# Altium PCB Guitar 元器件.pcbdoc
Units mil, origin at the board's own origin, x right, y up, seen from the top; angles counter-clockwise.
Board outline 4350 x 7276.94 mil, 2 copper layers (Top Layer, Bottom Layer); 41 components, 77 nets, 187 pads, 0 vias.
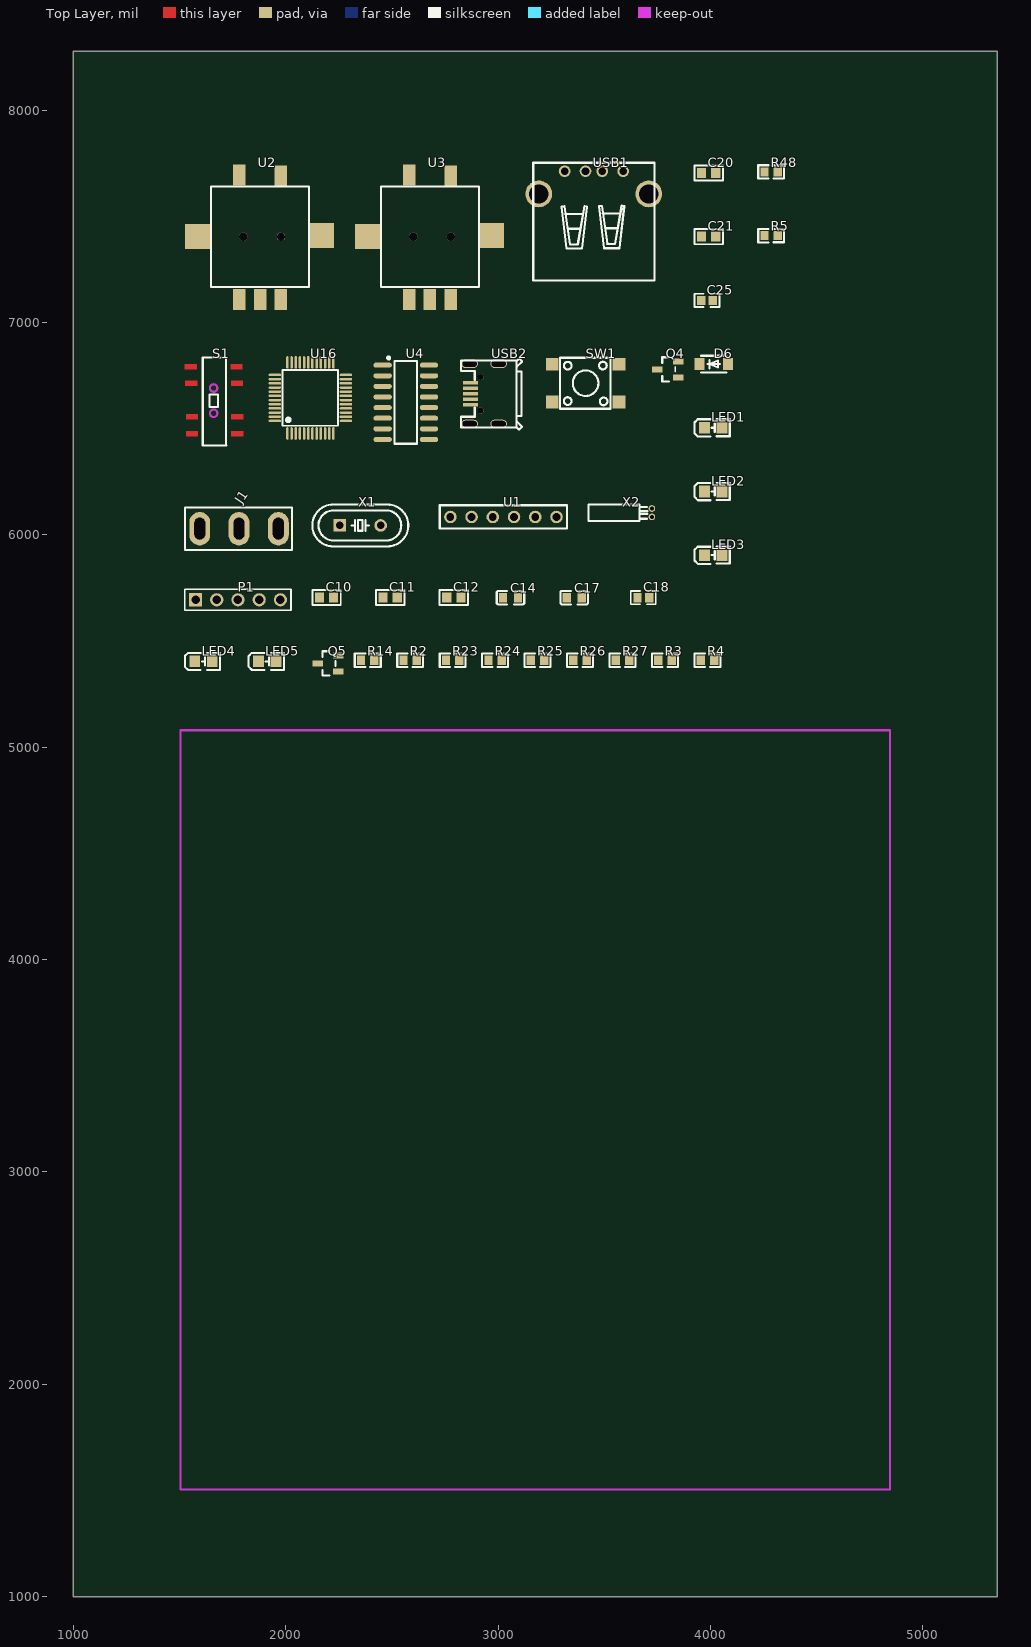
[diagram p0: Top Layer view]
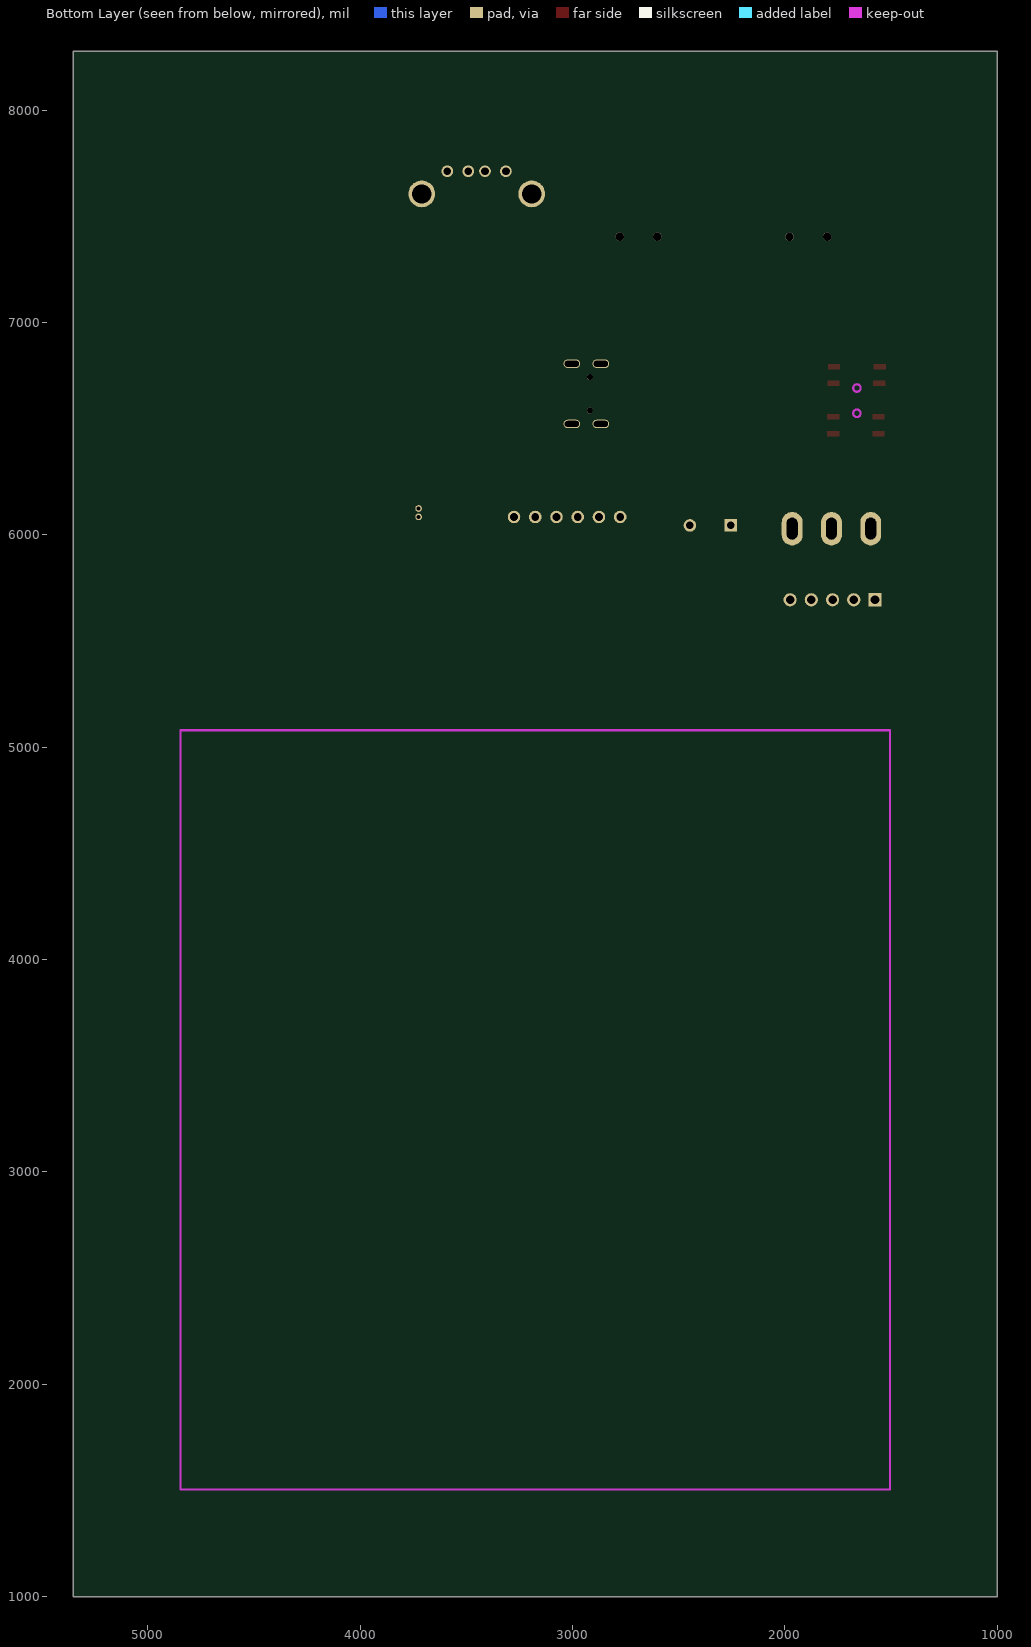
[diagram p1: Bottom Layer view, seen from below]

## Layer stack, top to bottom
Top Layer: signal copper (thickness not stored)
Dielectric: dielectric 12.6, FR-4, Dk 4.8
Bottom Layer: signal copper (thickness not stored)

## Board outline
5350,1000 1000,1000 1000,8276.94 5350,8276.94

## Components (designator, comment, footprint, x,y, rotation, side; value= is the part's Value field where it differs from the comment)
C10 "100nF" C0603#1 2158.46,5704.44 r0 top
C11 "100nF" C0603#1 2458.46,5704.44 r0 top
C12 "100nF" C0603#1 2758.46,5704.44 r0 top
C14 "10pF" C0603#2 3058.46,5704.44 r0 top
C17 "10pF" C0603#2 3358.46,5704.44 r0 top
C18 "22pF" 0603 3684.06,5704.44 r0 top
C20 "100nF" C0603#1 3958.46,7704.44 r0 top
C21 "10nF" C0603#1 3958.46,7404.44 r0 top
C25 "22pF" 0603 3984.06,7104.44 r0 top
D6 "1N4148W T4" SOD-123_L2.8-W1.8-LS3.7-RD 4015.55,6804.44 r0 top
J1 "MTS-102/3" MTS-102/MTS-103/MTS-123 1780,6029.44 r0 top
LED1 "17-21/GHC-XS1T2M/3T" LED0805-R-RD 4012.55,6504.49 r0 top
LED2 "17-21/GHC-XS1T2M/3T" LED0805-R-RD 4012.55,6204.49 r0 top
LED3 "17-21/GHC-XS1T2M/3T" LED0805-R-RD 4012.55,5904.49 r0 top
LED4 "17-21/GHC-XS1T2M/3T" LED0805-R-RD 1612.55,5404.49 r0 top
LED5 "17-21/GHC-XS1T2M/3T" LED0805-R-RD 1912.55,5404.49 r0 top
P1 "2.54mm 1*5P Header" HDR-TH_5P-P2.54-V 1775,5694.44 r0 top
Q4 "S8050" SOT-23-3_L2.9-W1.6-P1.90-LS2.8-BR 3798.81,6779.44 r0 top
Q5 "S8550" SOT-23-3_L2.9-W1.3-P1.90-LS2.4-BR 2198.81,5394.44 r0 top
R2 "1K" R0603 2586.02,5409.44 r0 top
R3 "1K" R0603 3786.02,5409.44 r0 top
R4 "1K" R0603 3986.02,5409.44 r0 top
R5 "1K" R0603 4286.02,7409.44 r0 top
R14 "1K" R0603 2386.02,5409.44 r0 top
R23 "10K" R0603 2786.02,5409.44 r0 top
R24 "1K" R0603 2986.02,5409.44 r0 top
R25 "1K" R0603 3186.02,5409.44 r0 top
R26 "1K" R0603 3386.02,5409.44 r0 top
R27 "10K" R0603 3586.02,5409.44 r0 top
R48 "1M" R0603 4286.02,7709.44 r0 top
S1 "八脚拨动开关" MSS23D19 1554.96,6614.44 r0 top
SW1 "PTS645SH43SMTR92LFS" KEY-SMD_4P-L6.0-W6.0-P4.50-LS9.0 3412.01,6714.44 r0 top
U1 "Header1*6" HEADER6 3025,6084.44 r0 top
U2 "EC11SMT" EC11SMT 1879.06,7404.44 r0 top
U3 "EC11SMT" EC11SMT 2679.05,7404.44 r0 top
U4 "CH340C" SOP-16_150MIL 2565.5,6624.44 r0 top
U16 "STM32F103C8T6" LQFP-48_L7.0-W7.0-P0.50-LS9.0-BL 2115.94,6644.94 r0 top
USB1 "KH-AF90DIP-112" USB-A-TH_USB-A-F-90 3450.69,7659.44 r0 top
USB2 "U-F-M5DD-Y-1" MICRO-USB-SMD_U-F-M5DD-Y-1 2934.24,6664.44 r0 top
X1 "8MHz" HC-49US_L11.5-W4.5-P4.88 2351.06,6044.44 r0 top
X2 "32.768KHz" OSC-TH_BD2.0-P0.70-D0.3 3724.21,6104.44 r0 top

## Footprints (in the part's own frame and the unit in brackets; to place one, negate y for a bottom-side part, rotate by r counter-clockwise, add the part's x,y. Pads: shape width x height; smd on the part's side, far side on the other; paste and mask are expansions set on the pad)
0603 [mm]
  rect 1x1.1 smd: 1(-0.7,0) 2(0.7,0)
  silkscreen extent -1.5,-0.8 1.5,0.8
C0603#1 [mil]
  rect 43.3x47.2 smd: 1(0,0) 2(66.9,0)
  silkscreen extent -33,-35 100,35
C0603#2 [mil]
  rect 39.37x43.31 smd: 1(-35.43,0) 2(35.43,0)
  silkscreen extent -65,-31 65,31
EC11SMT [mm]
  rect 3x3 smd: 0(-7.493,0) 0(7.366,0.127)
  rect 1.5x2.5 smd: 1(-2.5,7.366) 2(2.5,7.239) 3(-2.5,-7.493) 4(0,-7.493) 5(2.5,-7.493)
  round 1 hole 1 unplated: ""(-2,0) ""(2.5,0)
  silkscreen extent -5.85,-6 5.85,6
HC-49US_L11.5-W4.5-P4.88 [mm]
  rect 1.5x1.5 hole 0.9: 1(-2.438,0)
  round 1.5 hole 0.9: 2(2.438,0)
  silkscreen extent -5.74,-2.5 5.74,2.5
HDR-TH_5P-P2.54-V [mil]
  rect 62x62 hole 40.16: 1(-200,0)
  round 62 hole 40.16: 2(-100,0) 3(0,0) 4(100,0) 5(200,0)
  silkscreen extent -250,-50 250,50
HEADER6 [mm]
  round 1.5 hole 0.914: 1(-6.35,0) 2(-3.81,0) 3(-1.27,0) 4(1.27,0) 5(3.81,0) 6(6.35,0)
  silkscreen extent -7.62,-1.4 7.62,1.4
KEY-SMD_4P-L6.0-W6.0-P4.50-LS9.0 [mm]
  rect 1.5x1.5 smd: 1(-4,2.25) 2(4,2.25) 3(-4,-2.25) 4(4,-2.25)
  silkscreen extent -3.05,-3.05 2.98,3.05
LED0805-R-RD [mil]
  rect 51.2x55.1 smd: 1(41.35,0) 2(-41.35,0)
  silkscreen extent -88,-41 78,40
LQFP-48_L7.0-W7.0-P0.50-LS9.0-BL [mm]
  oval 0.3x1.5 smd: 1(-2.75,-4.25) 2(-2.25,-4.25) 3(-1.75,-4.25) 4(-1.25,-4.25) 5(-0.75,-4.25) 6(-0.25,-4.25) 7(0.25,-4.25) 8(0.75,-4.25) 9(1.25,-4.25) 10(1.75,-4.25) 11(2.25,-4.25) 12(2.75,-4.25) 25(2.75,4.25) 26(2.25,4.25) 27(1.75,4.25) 28(1.25,4.25) 29(0.75,4.25) 30(0.25,4.25) 31(-0.25,4.25) 32(-0.75,4.25) 33(-1.25,4.25) 34(-1.75,4.25) 35(-2.25,4.25) 36(-2.75,4.25)
  oval 1.5x0.3 smd: 13(4.25,-2.75) 14(4.25,-2.25) 15(4.25,-1.75) 16(4.25,-1.25) 17(4.25,-0.75) 18(4.25,-0.25) 19(4.25,0.25) 20(4.25,0.75) 21(4.25,1.25) 22(4.25,1.75) 23(4.25,2.25) 24(4.25,2.75) 37(-4.25,2.75) 38(-4.25,2.25) 39(-4.25,1.75) 40(-4.25,1.25) 41(-4.25,0.75) 42(-4.25,0.25) 43(-4.25,-0.25) 44(-4.25,-0.75) 45(-4.25,-1.25) 46(-4.25,-1.75) 47(-4.25,-2.25) 48(-4.25,-2.75)
  silkscreen extent -3.33,-3.31 3.3,3.34
MICRO-USB-SMD_U-F-M5DD-Y-1 [mm]
  rect 1.8x0.43 smd: 1(-1.626,-1.3) 2(-1.626,-0.65) 3(-1.626,0) 4(-1.626,0.65) 5(-1.626,1.3)
  oval 1.999x1 hole 0.7 slot 1.7 at 0 deg: 6(-1.735,3.599) 8(-1.735,-3.599)
  oval 1.999x1 hole 0.7 slot 1.7 at 0 deg copper offset 0.001,0: 7(1.735,3.6)
  oval 1.999x1 hole 0.7 slot 1.7 at 0 deg copper offset -0.001,0: 9(1.735,-3.6)
  round 0.7 hole 0.7 unplated: ""(-0.415,-2) ""(-0.415,2)
  silkscreen extent -2.77,-4.28 4.55,4.22
MSS23D19 [mm]
  round 0 smd: 1(-0.061,4.5) 2(0,2.54) 3(0.1,-1.5) 4(0.1,-3.5) 5(5.5,-3.5) 6(5.5,-1.5) 7(5.461,2.54) 8(5.4,4.5)
  Top Layer region: -0.6,-1.8 -0.6,-1.2 0.8,-1.2 0.8,-1.8
  Top Layer region: -0.7,2.24 -0.7,2.84 0.7,2.84 0.7,2.24
  Top Layer region: -0.761,4.2 -0.761,4.8 0.639,4.8 0.639,4.2
  Top Layer region: 4.8,-1.8 4.8,-1.2 6.2,-1.2 6.2,-1.8
  Top Layer region: 4.761,2.24 4.761,2.84 6.161,2.84 6.161,2.24
  Top Layer region: 4.7,4.2 4.7,4.8 6.1,4.8 6.1,4.2
  Top Layer region: 4.8,-3.8 4.8,-3.2 6.2,-3.2 6.2,-3.8
  Top Layer region: -0.6,-3.8 -0.6,-3.2 0.8,-3.2 0.8,-3.8
  Keep-Out Layer lines w0.254: 3.122,-1.062 cw(c2.672,-1.06) 3.122,-1.057 ; 3.122,1.961 cw(c2.672,1.963) 3.122,1.965
  silkscreen extent 1.37,-4.93 4.2,5.61
MTS-102/MTS-103/MTS-123 [mm]
  oval 2.5x4 hole 1.3 slot 2.6 at 90 deg: 1(-4.7,0) 2(0,0) 3(4.7,0)
  silkscreen extent -6.48,-2.54 6.35,2.54
OSC-TH_BD2.0-P0.70-D0.3 [mm]
  round 0.8 hole 0.5: 1(0,0.5) 2(0,-0.5)
  silkscreen extent -7.6,-1 -0.54,1
R0603 [mm]
  rect 1x1.1 smd: 1(-0.8,0) 2(0.8,0)
  silkscreen extent -1.55,-0.8 1.55,0.81
SOD-123_L2.8-W1.8-LS3.7-RD [mm]
  rect 1.2x1.4 smd: 1(-1.7,0) 2(1.7,0)
  silkscreen extent -1.5,-1 1.5,1
SOP-16_150MIL [mil]
  oval 86.53x23.62 smd: 1(-109,175) 2(-109,125) 3(-109,75) 4(-109,25) 5(-109,-25) 6(-109,-75) 7(-109,-125) 8(-109,-175) 9(109,-175) 10(109,-125) 11(109,-75) 12(109,-25) 13(109,25) 14(109,75) 15(109,125) 16(109,175)
  silkscreen extent -87,-195 53,215
SOT-23-3_L2.9-W1.3-P1.90-LS2.4-BR [mm]
  rect 1.25x0.7 smd: 1(1.25,-0.95) 2(1.25,0.95) 3(-1.25,0)
  silkscreen extent -0.65,-1.46 0.9,1.46
SOT-23-3_L2.9-W1.6-P1.90-LS2.8-BR [mm]
  rect 1.25x0.7 smd: 1(1.25,-0.95) 2(1.25,0.95) 3(-1.25,0)
  silkscreen extent -0.65,-1.46 0.9,1.46
USB-A-TH_USB-A-F-90 [mm]
  round 3.2 hole 2.3: 0(-6.571,-1.359) 0(6.571,-1.359)
  round 1.4 hole 0.92: 1(-3.492,1.359) 2(-0.993,1.359) 3(1.008,1.359) 4(3.508,1.359)
  silkscreen extent -7.25,-11.7 7.26,2.37

## Nets (pads, with @x,y where several pads share a name; then routed paths per layer and width w, separated by ;. In a path a pad name is that pad's centre, name@x,y a point inside that pad or via, vN(x,y) a via of type N, cw(c..) or ccw(c..) an arc to the next point about the centre after c; other vN are vias at no path point)
3.3V: C10.2 C11.2 C12.2 P1.4 Q5.2 R2.2 R3.2 R4.2 R5.2 R14.2 R23.2 R27.1 U16.9 U16.24 U16.36 U16.48
5V: C20.1 P1.5 U4.16 USB1.1 USB2.1
BOOT0: J1.3 R26.1 U16.44
BOOT1: J1.1 U16.20
C21_1: C21.1 U4.4
D+: U4.5 USB1.3 USB2.3
D-: U4.6 USB1.2 USB2.2
EX_IN: C17.2 U16.3 X2.2
EX_OUT: C14.2 U16.4 X2.1
GND: C10.1 C11.1 C12.1 C14.1 C17.1 C18.1 C20.2 C21.2 C25.1 J1.2 LED5.2 P1.1 S1.3 S1.6 SW1.3 U1.1 U1.6 U4.1 U16.8 U16.23 U16.35 U16.47 USB1.0 USB1.4 USB2.5 USB2.6 USB2.7 USB2.8 USB2.9
K1: LED4.2 S1.1 U2.1
K2: LED2.2 S1.4 U3.1
LED1_1: LED1.1 R2.1
LED2_1: LED2.1 R3.1
LED3_1: LED3.1 R4.1
LED4_1: LED4.1 R14.1
LED5_1: LED5.1 R5.1
OSC_IN: C18.2 R48.1 U16.5 X1.1
OSC_OUT: C25.2 R48.2 U16.6 X1.2
PA0: U16.10
PA1: U16.11
PA2: U16.12
PA3: U16.13
PA4: U16.14
PA5: U16.15
PA6: U16.16
PA7: U16.17
PA8: U16.29
PA11: U16.32
PA12: U16.33
PA15: U16.38
PB0: U1.2 U16.18
PB1: U1.3 U16.19
PB2: U1.4
PB3: U1.5 U16.39
PB4: LED1.2 U2.2 U16.40
PB5: LED3.2 U3.2 U16.41
PB6: S1.2 U16.42
PB7: S1.8 U16.43
PB8: S1.7 U16.45
PB9: S1.5 U16.46
PB10: U16.21
PB11: U16.22
PB12: U16.25
PB13: U16.26
PB14: U16.27
PB15: U16.28
PC13: U16.2
Q4_1: Q4.1 R24.2
Q4_2: Q4.2 R25.1 U4.14
Q4_3: D6.1 Q4.3 R23.1
Q5_1: Q5.1 R25.2
Q5_3: Q5.3 R26.2
R24_1: R24.1 U4.13
RESET: D6.2 R27.2 SW1.1 U16.7
RXD: P1.3 U4.2 U16.31
S$67: 
S$69: 
SW1_2: SW1.2
SW1_4: SW1.4
SWCLK: U16.37
SWDIO: U16.34
TXD: P1.2 U4.3 U16.30
U2_3: U2.3
U2_4: U2.4
U2_5: U2.5
U3_3: U3.3
U3_4: U3.4
U3_5: U3.5
U4_7: U4.7
U4_8: U4.8
U4_9: U4.9
U4_10: U4.10
U4_11: U4.11
U4_12: U4.12
U4_15: U4.15
U16_1: U16.1
pads on no net: U2. U2.0 U3. U3.0 USB2. USB2.4

## Silkscreen, mask and mechanical layers (free items; w line width, h text height)
Document:
  lines w0.1: 3174,4637.47 3176,4639.47